# Altium PCB THYRISTOR POWER REGULATOR.PcbDoc
Units mm, origin at the board's own origin, x right, y up, seen from the top; angles counter-clockwise.
Board outline 70 x 25 mm, 2 copper layers (Top Layer, Bottom Layer), stack 1.071 mm thick; 15 components, 10 nets, 34 pads, 5 vias.
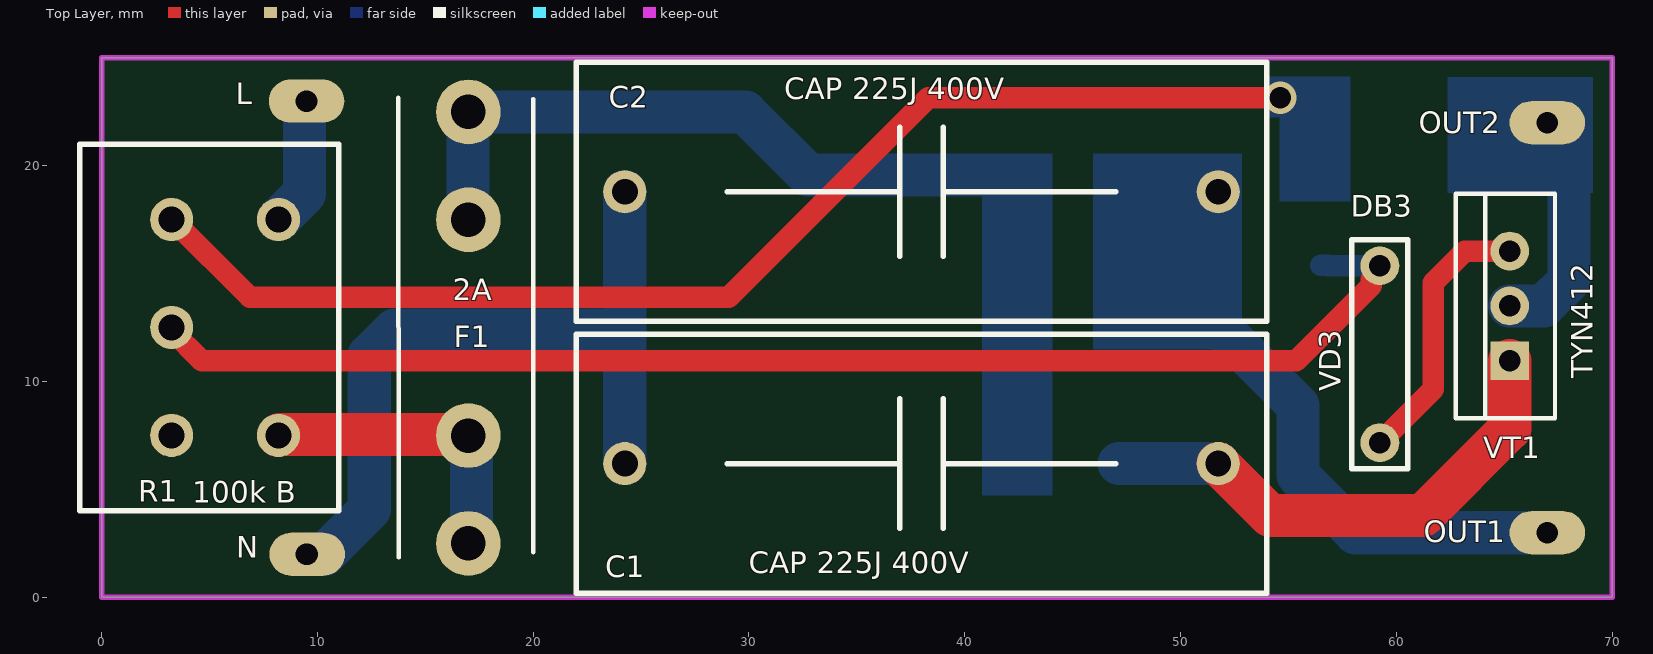
[diagram p0: Top Layer view]
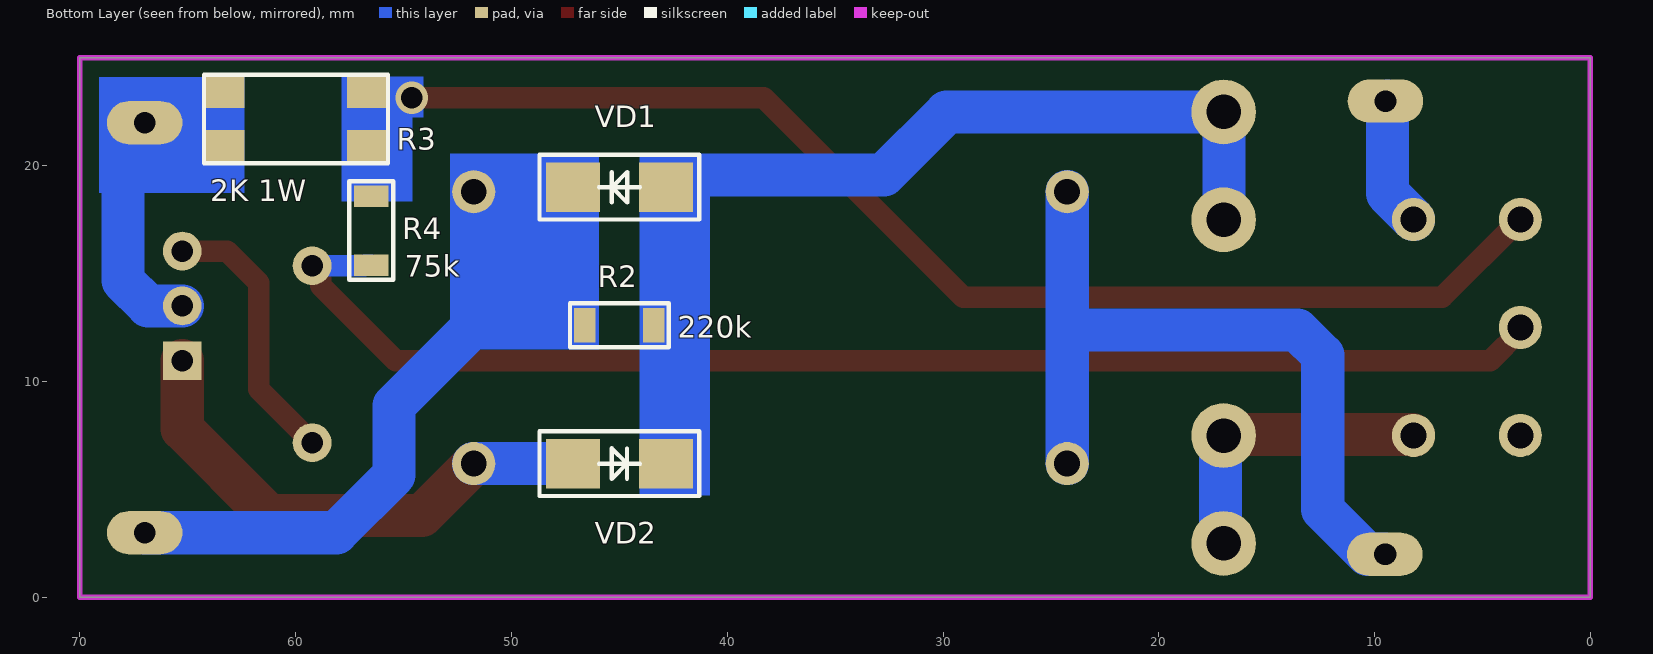
[diagram p1: Bottom Layer view, seen from below]
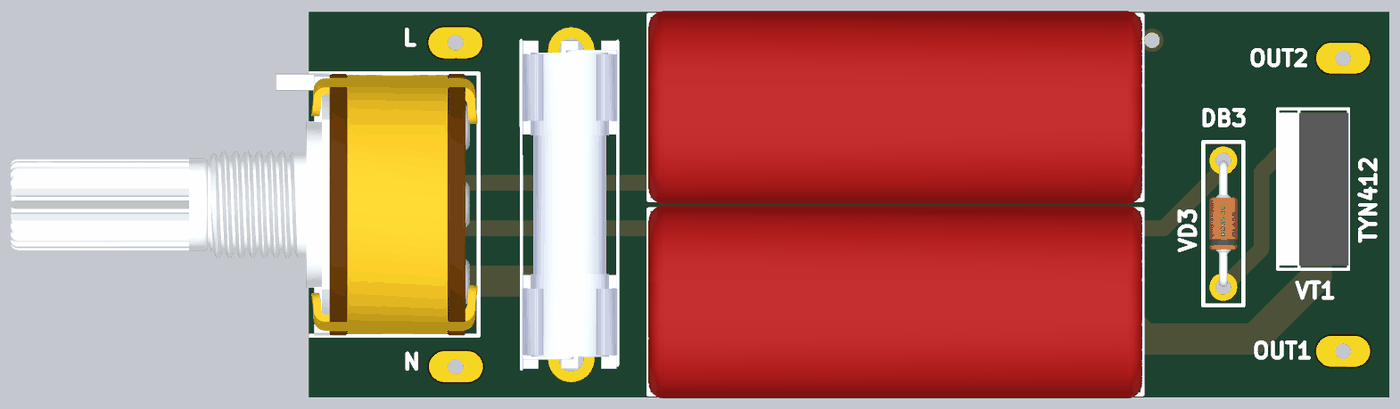
[diagram p2: 3D render of the assembled board from above, using the file's embedded part models]
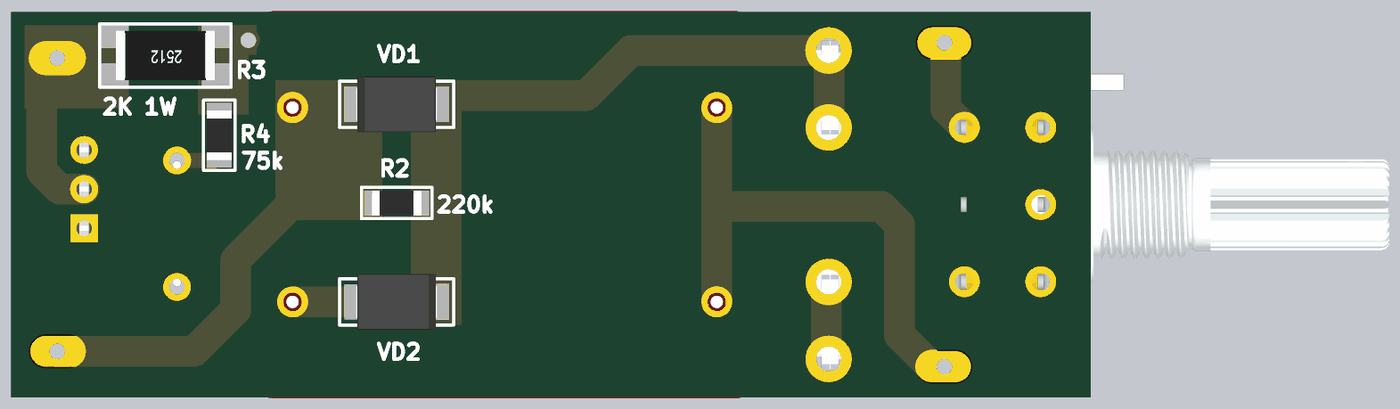
[diagram p3: 3D render of the assembled board from below, using the file's embedded part models]

## Layer stack, top to bottom
Top Solder: solder mask 0.0102, Solder Resist, Dk 3.5
Top Layer: signal copper 0.0356
Dielectric 1: dielectric 1, FR-4, Dk 4.8
Bottom Layer: signal copper 0.0356
Bottom Solder: solder mask 0.0102, Solder Resist, Dk 3.5

## Board outline
0,0 0,25 70,25 70,0

## Design rules (kind name [scope] priority, off if disabled: settings)
Clearance [All] p1: gap=0.3 ignorepadtopadclearanceinfootprint=FALSE except(0.2: Text-Text Text-Hole)
ComponentClearance [All] p1: gap=0.1 collisioncheckmode=3 verticalgap=0.1 showdistances=FALSE
DiffPairsRouting [All] p1: maxlimit=0.254 minlimit=0.254 mostfreqgap=0.254 substack1={A23D90DD-733B-49C5-8102-56B3D284E3A0} toplayer_{a23d90dd-733b-49c5-8102-56b3d284e3a0}_minwidth=0.381 toplayer_{a23d90dd-733b-49c5-8102-56b3d284e3a0}_maxwidth=0.381 toplayer_{a23d90dd-733b-49c5-8102-56b3d284e3a0}_prefwidth=0.381 bottomlayer_{a23d90dd-733b-49c5-8102-56b3d284e3a0}_minwidth=0.381 bottomlayer_{a23d90dd-733b-49c5-8102-56b3d284e3a0}_maxwidth=0.381 bottomlayer_{a23d90dd-733b-49c5-8102-56b3d284e3a0}_prefwidth=0.381 toplayer_minwidth=0.381 toplayer_maxwidth=0.381 toplayer_prefwidth=0.381 bottomlayer_minwidth=0.381 bottomlayer_maxwidth=0.381 bottomlayer_prefwidth=0.381 substack2={0B3DB408-A969-412D-8C07-BA8AE97219D9} toplayer_{0b3db408-a969-412d-8c07-ba8ae97219d9}_minwidth=0.381 toplayer_{0b3db408-a969-412d-8c07-ba8ae97219d9}_maxwidth=0.381 toplayer_{0b3db408-a969-412d-8c07-ba8ae97219d9}_prefwidth=0.381 bottomlayer_{0b3db408-a969-412d-8c07-ba8ae97219d9}_minwidth=0.381 bottomlayer_{0b3db408-a969-412d-8c07-ba8ae97219d9}_maxwidth=0.381 bottomlayer_{0b3db408-a969-412d-8c07-ba8ae97219d9}_prefwidth=0.381 substack3={378827E6-B38F-4565-9D2F-710D8D441C30} toplayer_{378827e6-b38f-4565-9d2f-710d8d441c30}_minwidth=0.381 toplayer_{378827e6-b38f-4565-9d2f-710d8d441c30}_maxwidth=0.381 toplayer_{378827e6-b38f-4565-9d2f-710d8d441c30}_prefwidth=0.381 bottomlayer_{378827e6-b38f-4565-9d2f-710d8d441c30}_minwidth=0.381 bottomlayer_{378827e6-b38f-4565-9d2f-710d8d441c30}_maxwidth=0.381 bottomlayer_{378827e6-b38f-4565-9d2f-710d8d441c30}_prefwidth=0.381 substack4={1E65D4A7-266F-4925-B814-5E9C4A66F8EE} toplayer_{1e65d4a7-266f-4925-b814-5e9c4a66f8ee}_minwidth=0.381 toplayer_{1e65d4a7-266f-4925-b814-5e9c4a66f8ee}_maxwidth=0.381 toplayer_{1e65d4a7-266f-4925-b814-5e9c4a66f8ee}_prefwidth=0.381 bottomlayer_{1e65d4a7-266f-4925-b814-5e9c4a66f8ee}_minwidth=0.381 bottomlayer_{1e65d4a7-266f-4925-b814-5e9c4a66f8ee}_maxwidth=0.381 bottomlayer_{1e65d4a7-266f-4925-b814-5e9c4a66f8ee}_prefwidth=0.381 substack5={93C5D03E-862D-45F8-9871-970EEA9B3F11} toplayer_{93c5d03e-862d-45f8-9871-970eea9b3f11}_minwidth=0.381 toplayer_{93c5d03e-862d-45f8-9871-970eea9b3f11}_maxwidth=0.381 toplayer_{93c5d03e-862d-45f8-9871-970eea9b3f11}_prefwidth=0.381 bottomlayer_{93c5d03e-862d-45f8-9871-970eea9b3f11}_minwidth=0.381 bottomlayer_{93c5d03e-862d-45f8-9871-970eea9b3f11}_maxwidth=0.381 bottomlayer_{93c5d03e-862d-45f8-9871-970eea9b3f11}_prefwidth=0.381 maxuncoupledlength=12.7
Height [All] p1: minheight=0 maxheight=30 prefheight=30
HoleSize [All] p1: absolutevalues=TRUE maxlimit=6 minlimit=0.01 maxpercent=80.000 minpercent=20.000
HoleToHoleClearance [All] p1: gap=0.1 allowstackedmicrovias=TRUE
MinimumSolderMaskSliver [All] p1: minsoldermaskwidth=0.1
PlaneConnect [All] p1: pad.planeconnectstyle=Relief pad.reliefexpansion=0.5 pad.reliefentries=4 pad.reliefconductorwidth=0.5 pad.reliefairgap=0.15 via.planeconnectstyle=Direct via.reliefexpansion=0.5 via.reliefentries=4 via.reliefconductorwidth=0.5 via.reliefairgap=0.15
PolygonConnect VQFN20 [HasFootprint('VQFN20')] p1: connectstyle=Direct reliefconductorwidth=0.254 reliefentries=4 polygonreliefangle="90 Angle" airgapwidth=0.254
PolygonConnect [All] p2: thpad.connectstyle=Relief thpad.reliefconductorwidth=0.3 thpad.reliefentries=4 thpad.polygonreliefangle="90 Angle" thpad.airgapwidth=0.15 smdpad.connectstyle=Relief smdpad.reliefconductorwidth=0.3 smdpad.reliefentries=4 smdpad.polygonreliefangle="90 Angle" smdpad.airgapwidth=0.15 via.connectstyle=Direct via.reliefconductorwidth=0.3 via.reliefentries=4 via.polygonreliefangle="90 Angle" via.airgapwidth=0.15
RoutingVias [All] p1: holewidth=0.1 width=0.1 viastyle="Through Hole" minholewidth=0.11 minwidth=0.1 maxholewidth=2 maxwidth=1
ShortCircuit [All] p1: allowed=TRUE
SilkToSolderMaskClearance [IsPad] p1: minsilkscreentomaskgap=0.1 clearancetoexposedcopper=TRUE
SolderMaskExpansion SolderMaskExpansion_Via [IsVia] p1: expansion=0.102 istentingtop=TRUE
SolderMaskExpansion [All] p2: expansion=0.01 istentingtop=FALSE
UnRoutedNet [All] p1: checkbadconnections=TRUE
Width [All] p1: maxlimit=5 minlimit=0.2 preferedwidth=0.3 substack1={A23D90DD-733B-49C5-8102-56B3D284E3A0} substack2={0B3DB408-A969-412D-8C07-BA8AE97219D9} substack3={378827E6-B38F-4565-9D2F-710D8D441C30} substack4={1E65D4A7-266F-4925-B814-5E9C4A66F8EE} substack5={93C5D03E-862D-45F8-9871-970EEA9B3F11}
20 further rules are at their usual default settings.

## Components (designator, comment, footprint, x,y, rotation, side; value= is the part's Value field where it differs from the comment)
C1 "CAP 225J 400V" "CAP 225J 400V" 38,6.2 r180 top locked
C2 "CAP 225J 400V" "CAP 225J 400V" 38,18.8 r180 top locked
F1 "2A" "BMS 2S" 17,12.5 r90 top locked
L "Test_Point_PCB" Test_Point#1 9.5,23 r90 top
N "Test_Point_PCB" Test_Point#2 9.5,2 r90 top locked
OUT1 "Test_Point_PCB" Test_Point#1 67,3 r90 top locked
OUT2 "Test_Point_PCB" Test_Point#1 67,22 r90 top locked
R1 "100k B" RES_VAR 5,12.51 r270 top locked
R2 "220k" RES-1206 45,12.61 r180 bottom locked
R3 "2K 1W" RES-2512 60,22.17 r0 bottom locked
R4 "75k" RES-1206 56.5,17 r270 bottom locked
VD1 "DIODE" DO-214AA 45,19.01 r180 bottom locked value=B340B-13-F
VD2 "DIODE" DO-214AA 45,6.2 r0 bottom locked value=B340B-13-F
VD3 "DB3" DB3 59.24,11.27 r90 top
VT1 "TYN412" TO-220-3 62.86,13.51 r90 top locked

## Footprints (in the part's own frame and the unit in brackets; to place one, negate y for a bottom-side part, rotate by r counter-clockwise, add the part's x,y. Pads: shape width x height; smd on the part's side, far side on the other; paste and mask are expansions set on the pad)
"BMS 2S" [mm]
  round 3 / inner oval 3x4 / far side round 3 hole 1.6: 1(-10,0) 1(-5,0) 2(5,0) 2(10,0)
  silkscreen extent -10.65,-3 10.65,3.25, body extent -10.64,-3 10.64,3.19, height 10.59
"CAP 225J 400V" [mm]
  round 2 hole 1.2: 1(-13.75,0) 2(13.75,0)
  silkscreen extent -16,-6 16,6, body extent -16,-6.25 16,6.25, height 26.5
DB3 [mm]
  round 1.8 hole 1: 1(-4.1,0) 2(4.1,0)
  silkscreen extent -5.3,-1.3 5.3,1.3, body extent -4.09,-0.89 4.09,0.89, height 1.82
DO-214AA [mm]
  rect 2.5x2.3 smd: 1(-2.15,0) 2(2.15,0)
  silkscreen extent -3.7,-1.5 3.7,1.5, body extent -2.65,-1.81 2.65,1.81, height 2.5
RES-1206 [mm]
  rect 1x1.6 smd: 1(-1.6,0) 2(1.6,0)
  silkscreen extent -2.29,-1.02 2.29,1.02, body extent -1.6,-0.8 1.6,0.8, height 0.6
RES-2512 [mm]
  rect 1.8x1.45 smd: 1(-3.275,-1.225) 1(-3.275,1.225) 2(3.275,-1.225) 2(3.275,1.225)
  silkscreen extent -4.28,-2.05 4.25,2.05, body extent -3.2,-1.6 3.2,1.6, height 0.6
RES_VAR [mm]
  round 2 hole 1.2: 1(-5,-1.75) 2(0,-1.75) 3(5,-1.75) 4(5,3.2) 5(-5,3.2)
  silkscreen extent -8.5,-6 8.5,6, body extent -8.5,-24.35 8.5,5.94, height 22.49
Test_Point#1 [mm]
  oval 2x3.5 hole 1 unplated paste+0.102 mask+0.102: 1(0,0)
Test_Point#2 [mm]
  oval 2x3.5 hole 1 unplated paste+0.102 mask+0.102: 1(0,-0.03)
TO-220-3 [mm]
  rect 1.8x1.8 hole 1: 1(-2.54,-2.4)
  round 1.8 hole 1: 2(0,-2.4) 3(2.54,-2.4)
  silkscreen extent -5.2,-4.5 5.2,0.1, body extent -4.95,-4.5 4.95,0, height 18.8

## Part data
F1: library part F?
L N OUT1 OUT2: library part TP_PCB?, "Test_Point"
R1: library part RES_VAR
R2 R3 R4: library part RES-CONST
VD1 VD2: library part B340B-13-F, "Diode Schottky 40 V 3A Surface Mount SMB", Manufacturer="Diodes Incorporated", ComponentLink1Description="Database URL", ComponentLink1URL=http://el.udtech.dev/component/1956/detail, ID=D-00025, In Stock=0, Part Number=B340B-13-F
VD3: library part DIODE

## Via types
v1: diameter 1.8, hole 1, Top Layer to Bottom Layer, tented both sides, 4 vias
v2: diameter 1.5, hole 1, Top Layer to Bottom Layer, tented both sides, 1 vias

## Nets (pads, with @x,y where several pads share a name; then routed paths per layer and width w, separated by ;. In a path a pad name is that pad's centre, name@x,y a point inside that pad or via, vN(x,y) a via of type N, cw(c..) or ccw(c..) an arc to the next point about the centre after c; other vN are vias at no path point)
NetC1_1: C1.1 VD2.2 VT1.1 | length 23.9
  Top Layer w2: C1.1 54.16,3.79 61.24,3.79 65.26,7.81 VT1.1
  Bottom Layer w2: VD2.2 C1.1
NetC1_2: C1.2 C2.2 N.1 | length 35.8
  Bottom Layer w2: N.1 10.34,2 12.41,4.07 12.41,11.22 13.582,12.392 24.25,12.392 ; C1.2 24.25,12.392 ; C2.2 24.25,12.392
  other v1: 9.5,2
NetC2_1: C2.1 OUT1.1 R2.1 VD1.1 | length 22.2
  Bottom Layer w2: 50.968,13.372 55.44,8.9 55.44,5.675 58.115,3 v1(67,3)
NetF1_1: F1.1 R1.4 | length 13.9
  Top Layer w2: R1.4 8.24,7.55 F1.1@16.95,7.55
  Bottom Layer w2: F1.1@17,2.5 17.15,2.65 17.15,7.35 F1.1@17,7.5
NetF1_2: F1.2 R2.2 VD1.2 VD2.1 | length 31.3
  Bottom Layer w2: F1.2@16.98,17.52 F1.2@16.98,22.48 ; F1.2@17.96,22.49 29.83,22.49 32.74,19.58 41.428,19.58 41.848,19.16 42.7,19.16 VD1.2
NetL_1: L.1 R1.5 | length 6
  Bottom Layer w2: R1.5 9.41,18.72 L.1@9.41,23
  other v1: 9.5,23
NetOUT2_1: OUT2.1 R3.2 VT1.2 | length 12
  Bottom Layer w2: VT1.2 66.838,13.51 68.01,14.682 68.01,20.828 67.75,21.088 67.75,22 v1(67,22) ; OUT2.1@66.92,21.74 OUT2.1@67.31,22.13
NetR1_1: R1.1 R3.1 R4.1 | length 57.3
  Top Layer w1: R1.1@3.12,17.383 R1.1@3.12,18.017 ; R1.1@3.28,17.51 6.88,13.91 29.07,13.91 38.32,23.16 v2(54.62,23.16)
NetR1_2: R1.2 R4.2 VD3.2 | length 61.5
  Top Layer w1: R1.2@3.218,12.392 4.64,10.97 55.37,10.97 58.84,14.44 58.84,14.754 59.24,15.154 VD3.2
  Bottom Layer w1: R4.2 56.8,15.4 56.83,15.37 VD3.2
NetVD3_1: VD3.1 VT1.3 | length 12.6
  Top Layer w1: VD3.1 61.71,9.64 61.71,14.59 63.17,16.05 VT1.3
pads on no net: R1.3

## Keep-outs
Keep-Out Layer:
  lines w0.254: 70,0 0,0 0,25 70,25 ; 70,0.04 70,24.976

## Other copper
Bottom Layer:
  rectangle net NetOUT2_1: 62.375,18.74 69.11,24.12
  rectangle net NetR1_1: 54.07,22.23 57.59,24.14
  rectangle net NetC2_1: 45.946,11.49 52.85,20.57
  rectangle net NetF1_2: 40.8,4.73 44.07,20.57
  rectangle net NetR1_1: 54.59,18.35 57.88,24.14